# Altium PCB PCB_markw.pcbdoc
Units mm, origin at the board's own origin, x right, y up, seen from the top; angles counter-clockwise.
Board outline 132.6 x 130.99 mm, 2 copper layers (Top Layer, Bottom Layer); 60 components, 53 nets, 206 pads, 211 vias.
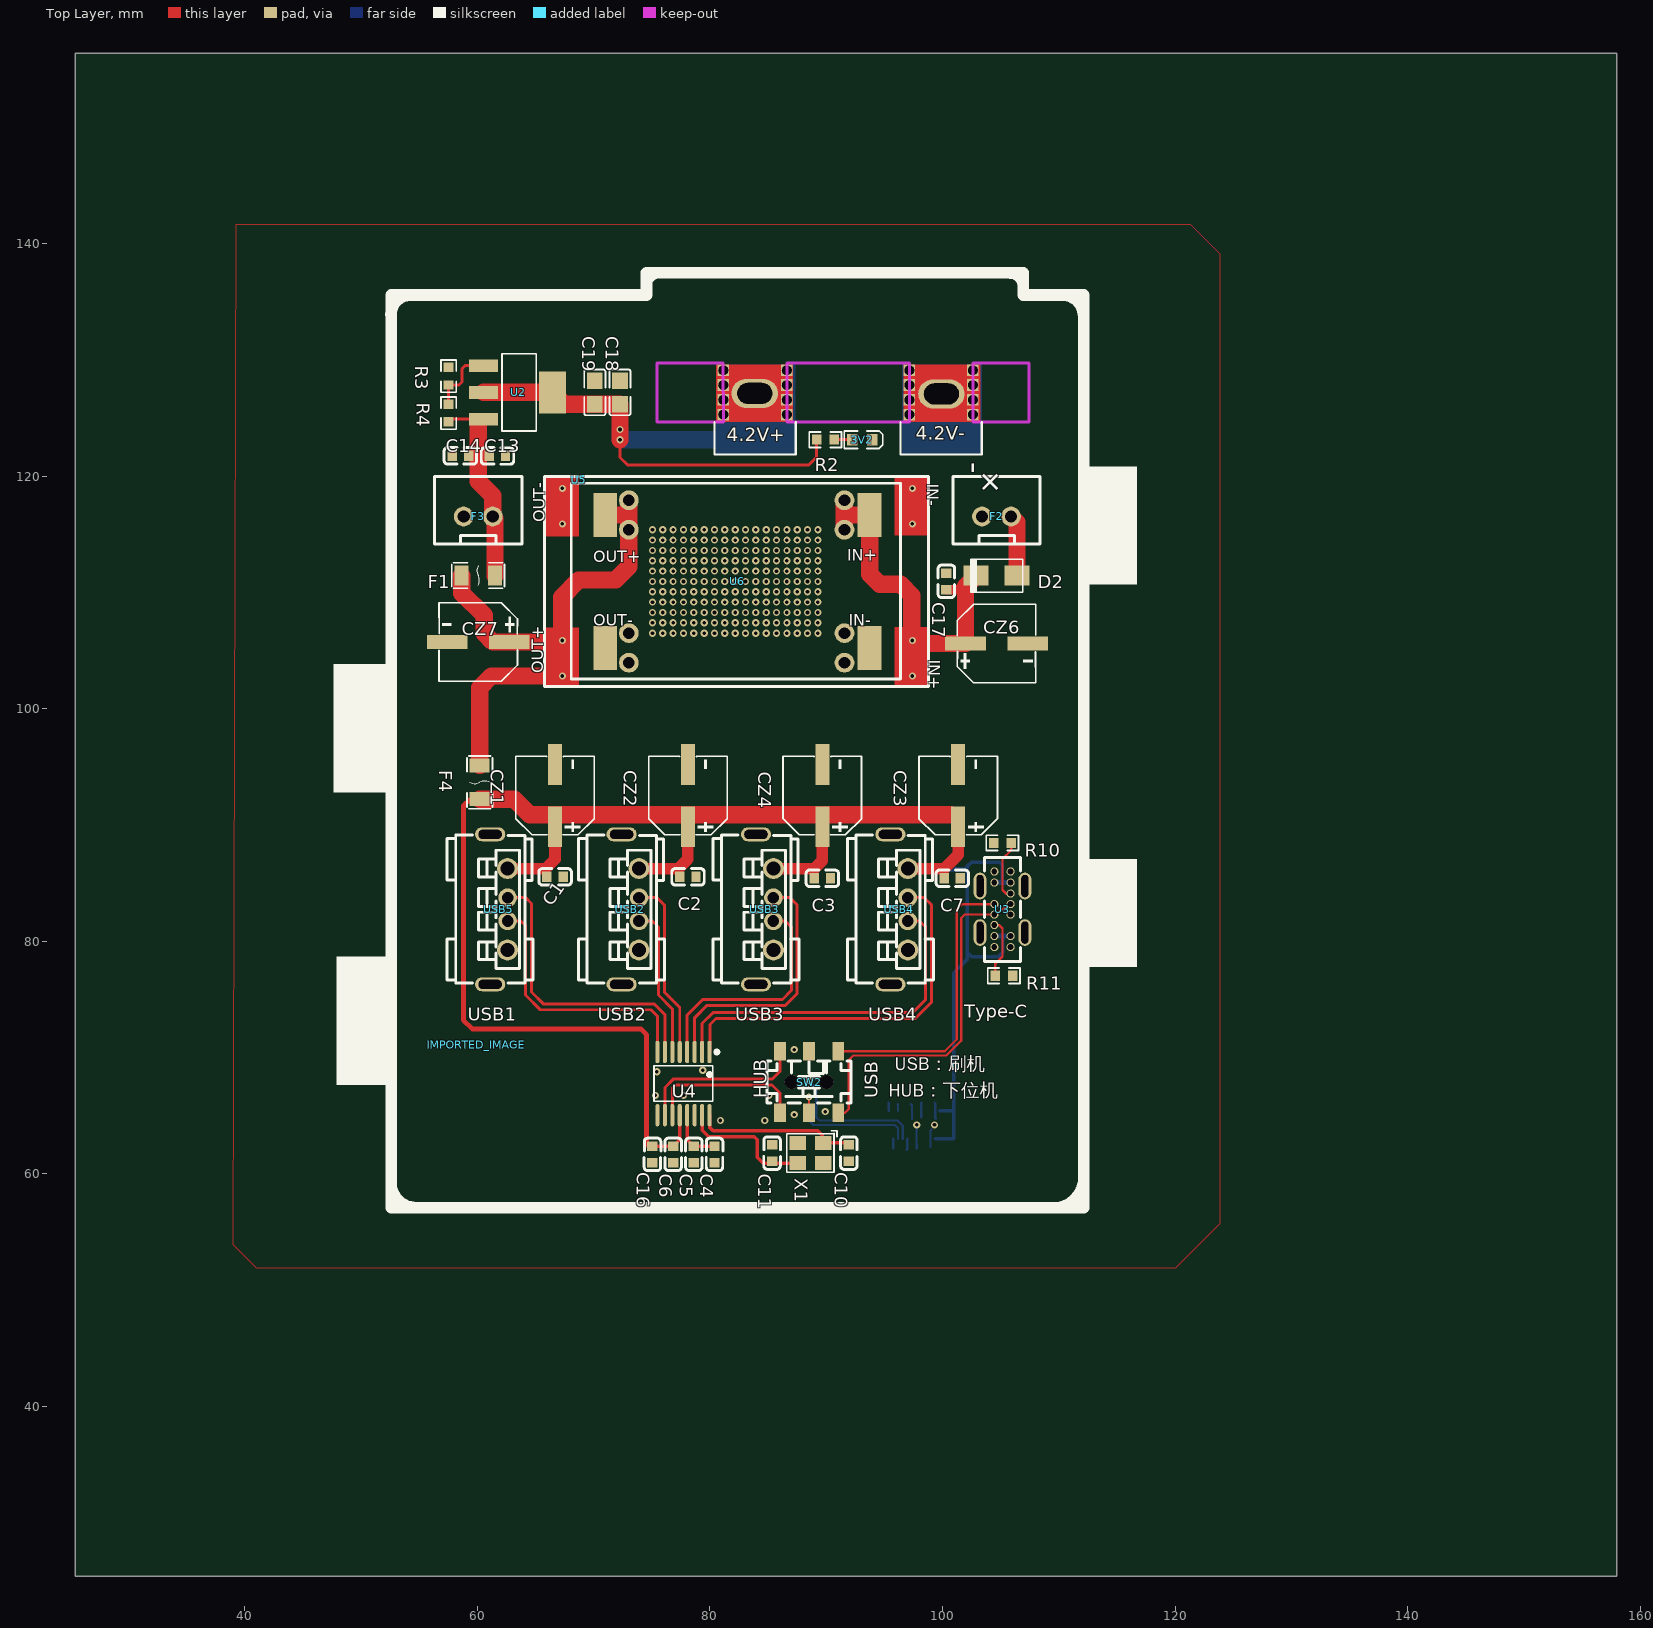
[diagram p0: Top Layer view]
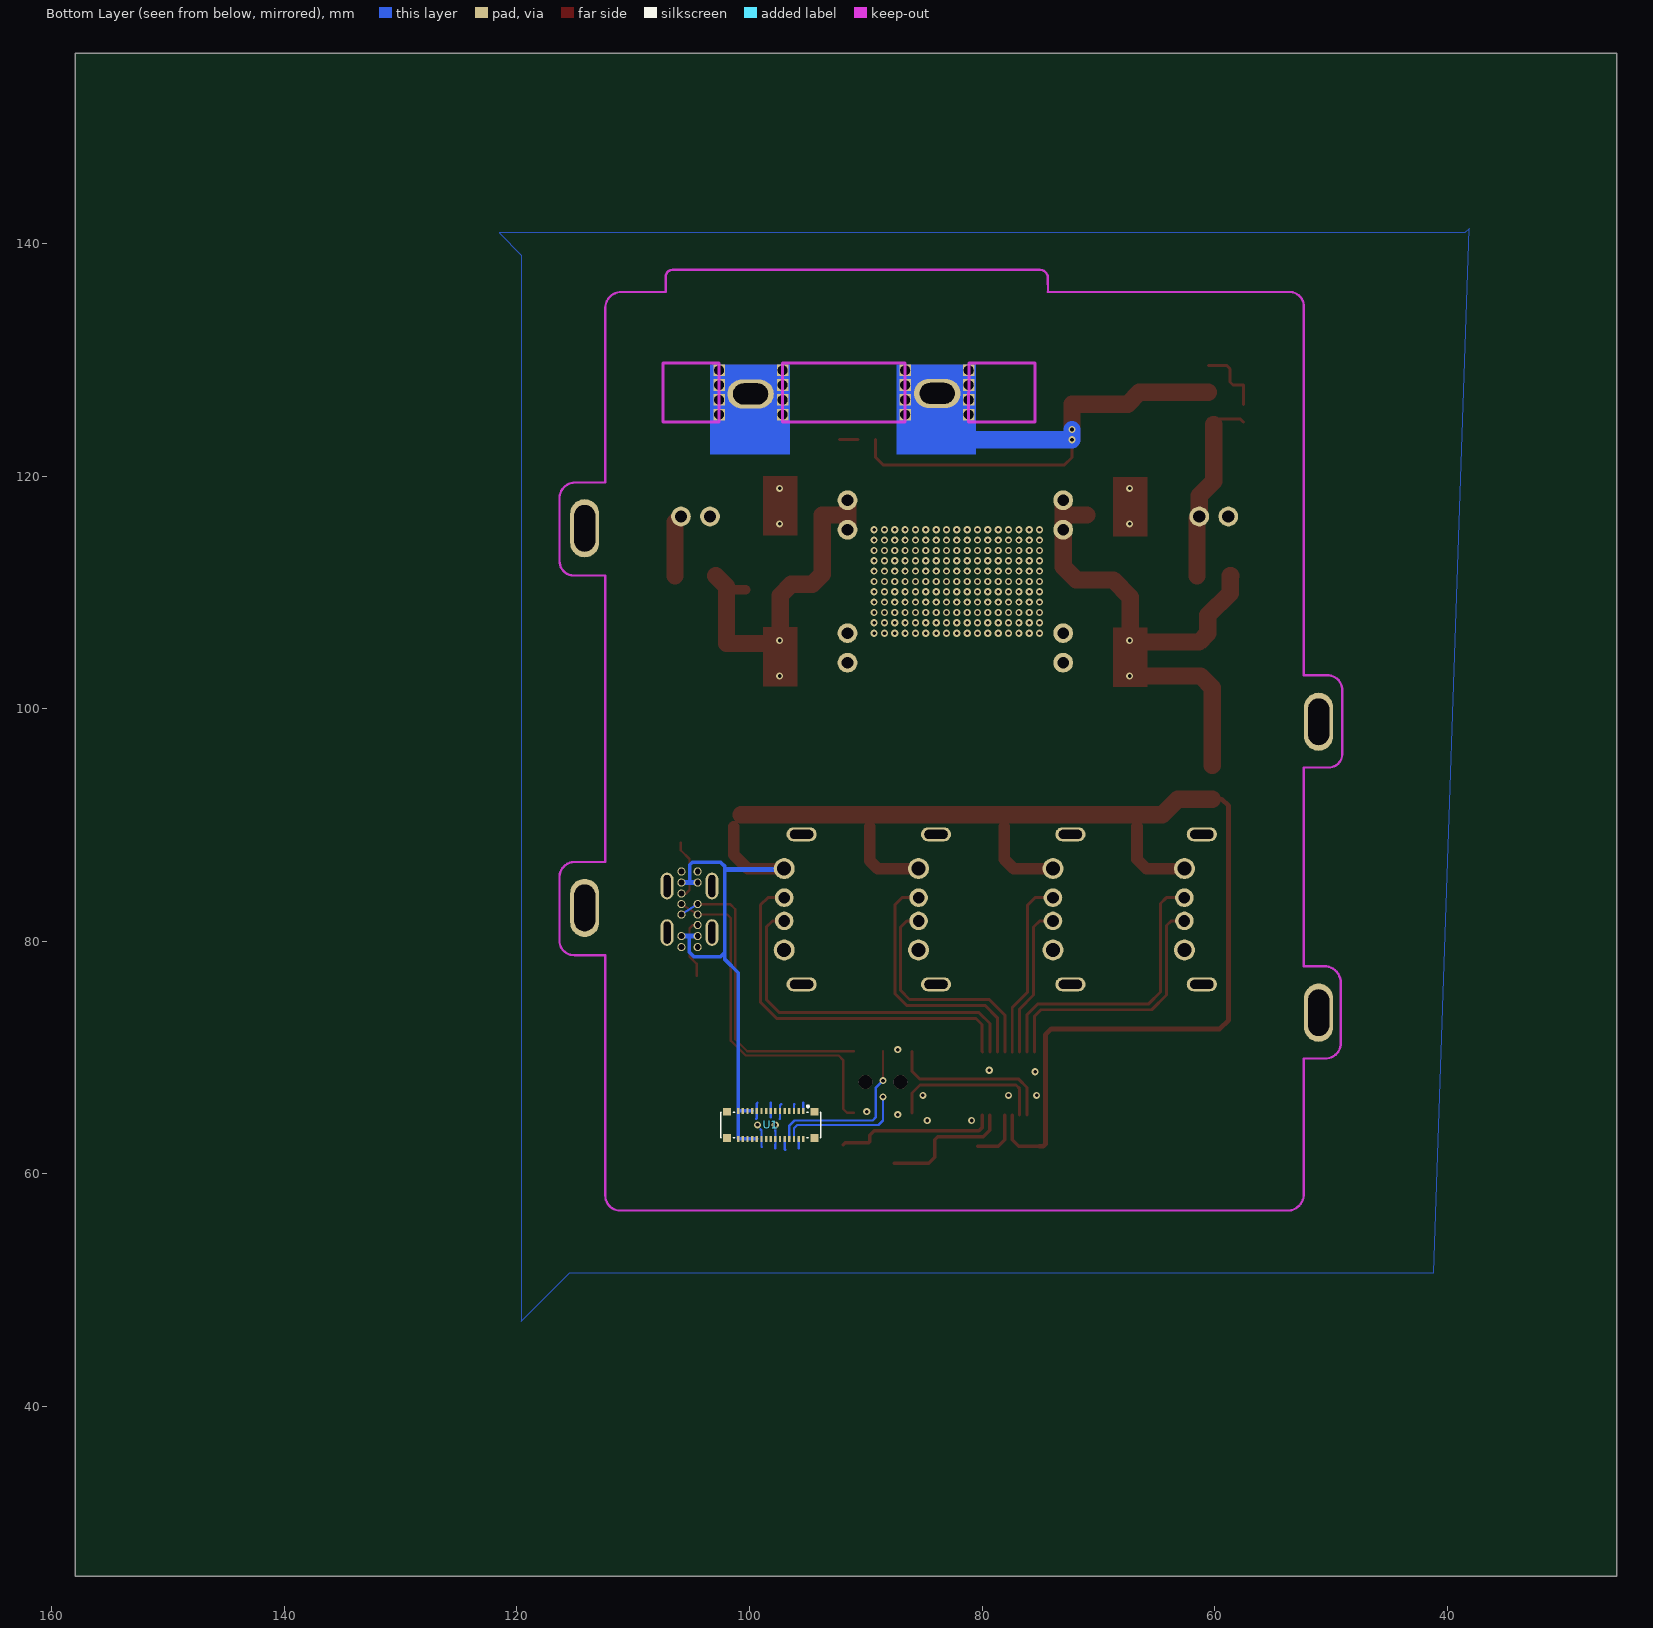
[diagram p1: Bottom Layer view, seen from below]

## Layer stack, top to bottom
Top Layer: signal copper (thickness not stored)
Dielectric: dielectric 0.32, FR-4, Dk 4.8
Bottom Layer: signal copper (thickness not stored)

## Board outline
158,25.4 25.4,25.4 25.4,156.388 158,156.388

## Components (designator, comment, footprint, x,y, rotation, side; value= is the part's Value field where it differs from the comment)
3V2 "LED" LED0603-R-BI 93.107,123.137 r180 top
C1 "10uf" C0603 66.675,85.545 r180 top
C2 "10uf" C0603 78.105,85.545 r180 top
C3 "10uf" C0603 89.662,85.418 r180 top
C4 "10uf" C0603 80.391,61.669 r270 top
C5 "10uf" C0603 78.613,61.669 r270 top
C6 "10uf" C0603 76.835,61.669 r270 top
C7 "100NF" C0603 100.838,85.418 r180 top
C10 "22PF" C0603 91.948,61.796 r90 top
C11 "22PF" C0603 85.344,61.796 r90 top
C13 "10UF" C0603 61.722,121.74 r180 top
C14 "100NF" C0603 58.547,121.74 r0 top
C16 "10uf" C0603 75.057,61.669 r270 top
C17 "0.1uF" C0603 100.33,110.945 r270 top
C18 "100NF" C0805 72.263,127.201 r270 top
C19 "10UF" C0805 70.104,127.201 r270 top
CZ1 "100uF" CAP-SMD_BD6.3-L6.6-W6.6-LS7.4-FD 66.676,92.531 r90 top
CZ2 "100uF" CAP-SMD_BD6.3-L6.6-W6.6-LS7.4-FD 78.106,92.531 r90 top
CZ3 "100uF" CAP-SMD_BD6.3-L6.6-W6.6-LS7.4-FD 101.347,92.531 r90 top
CZ4 "100uF" CAP-SMD_BD6.3-L6.6-W6.6-LS7.4-FD 89.663,92.531 r90 top
CZ6 "100uF" CAP-SMD_BD6.3-L6.6-W6.6-LS7.4-FD 104.649,105.612 r0 top
CZ7 "100uF" CAP-SMD_BD6.3-L6.6-W6.6-LS7.4-FD 60.072,105.739 r180 top
D2 "RS2MBG" DO214AC 104.648,111.453 r180 top
F1 "nSMD020" F1206 60.071,111.453 r0 top
F2 "2P" CONN-TH_2P-P2.50-XH2.54-2P 104.648,116.533 r180 top
F3 "2P" CONN-TH_2P-P2.50-XH2.54-2P 60.071,116.533 r180 top
F4 "nSMD020" F1206 60.198,93.673 r270 top
IMPORTED_IMAGE "IMPORTED_IMAGE" IMPORTED_IMAGE 59.914,71.1 r0 top
R2 "10K" R0603 89.932,123.137 r0 top
R3 "200" R0603 57.531,128.598 r90 top
R4 "100" R0603 57.531,125.423 r270 top
R10 "5.1K" R0603 105.156,88.466 r180 top
R11 "5.1K" R0603 105.283,77.036 r0 top
SW2 "K3-1390S-E1" SW-SMD_K3-1390S-E1 88.519,67.892 r270 top
U1 "OK-14F030-04" CONN-SMD_OK-14F030-04 98.171,64.209 r180 bottom
U2 "AMS1117-5.0RG" SOT-223-3_L6.4-W3.5-P2.30-LS7.0-BR 63.499,127.203 r180 top
U3 "TYPEC14PF立插式无弹片" USB-C-TH_918-418K2022Y40011 105.156,82.751 r90 top
U4 "CH334R" QSOP-16_L4.9-W3.9-P0.64-LS6.0-BL 77.724,67.765 r180 top
U5 "MINI5605V5A输出电源模块" MINI560PRO 68.707,119.708 r180 top
U6 "MP1584" MP1584DCDC 82.296,111.326 r180 top
USB2 "A/F180度插板10铜壳鱼叉脚无卷边_C109356" USB-A-TH_USB-A-F-1 73.152,82.751 r270 top
USB3 "A/F180度插板10铜壳鱼叉脚无卷边_C109356" USB-A-TH_USB-A-F-1 84.709,82.751 r270 top
USB4 "A/F180度插板10铜壳鱼叉脚无卷边_C109356" USB-A-TH_USB-A-F-1 96.266,82.751 r270 top
USB5 "A/F180度插板10铜壳鱼叉脚无卷边_C109356" USB-A-TH_USB-A-F-1 61.849,82.751 r270 top
X1 "12MHz" OSC-SMD_4P-L3.2-W2.5-BL 88.646,61.796 r180 top
? "" ? 83.502,65.505 r0 top
? "" ? 96.99,62.039 r0 top
? "" ? 66.515,80.327 r0 top
? "" ? 108.491,91.174 r0 top
? "" ? 93.511,117.337 r0 top
? "" ? 51.732,102.793 r0 top
? "" ? 53.868,86.38 r0 top
? "" ? 113.295,85.729 r0 top
? "" ? 121.003,69.843 r0 top
? "" ? 110.217,99.255 r0 top
? "" ? 118.51,113.453 r0 top
? "" ? 46.761,119.327 r0 top
? "" ? 119.352,127.645 r0 top
? "" ? 128.949,111.326 r0 top
? "" ? 63.309,137.705 r0 top

## Footprints (in the part's own frame and the unit in brackets; to place one, negate y for a bottom-side part, rotate by r counter-clockwise, add the part's x,y. Pads: shape width x height; smd on the part's side, far side on the other; paste and mask are expansions set on the pad)
C0603 [mm]
  rect 0.8x0.9 smd paste+0 mask+0.051: 1(-0.7,0) 2(0.7,0)
  silkscreen extent -1.41,-0.71 1.39,0.72
C0805 [mm]
  rect 1.41x1.35 smd paste-100 mask+0.051: 1(-1,0) 2(1,0)
  silkscreen extent -1.96,-0.9 1.96,0.9
CAP-SMD_BD6.3-L6.6-W6.6-LS7.4-FD [mm]
  rect 3.5x1.2 smd paste+0 mask+0.051: 1(-2.67,0) 2(2.67,0)
  silkscreen extent -3.38,-3.38 3.38,3.38
CONN-SMD_OK-14F030-04 [mm]
  rect 0.2x0.5 smd paste+0 mask+0.05: 1(2.8,1.2) 2(2.4,1.2) 3(2,1.2) 4(1.6,1.2) 5(1.2,1.2) 6(0.8,1.2) 7(0.4,1.2) 8(0,1.2) 9(-0.4,1.2) 10(-0.8,1.2) 11(-1.2,1.2) 12(-1.6,1.2) 13(-2,1.2) 14(-2.4,1.2) 15(-2.8,1.2) 16(-2.8,-1.2) 17(-2.4,-1.2) 18(-2,-1.2) 19(-1.6,-1.2) 20(-1.2,-1.2) 21(-0.8,-1.2) 22(-0.4,-1.2) 23(0,-1.2) 24(0.4,-1.2) 25(0.8,-1.2) 26(1.2,-1.2) 27(1.6,-1.2) 28(2,-1.2) 29(2.4,-1.2) 30(2.8,-1.2)
  rect 0.7x0.65 smd paste+0 mask+0.05: 31(3.75,-1.125) 32(3.75,1.125) 33(-3.75,1.125) 34(-3.75,-1.125)
  silkscreen extent -4.3,-1.1 4.3,1.7
CONN-TH_2P-P2.50-XH2.54-2P [mm]
  round 1.7 hole 1.05 paste+0 mask+0.05: 1(1.25,0) 2(-1.25,0)
  silkscreen extent -3.75,-3.42 3.75,2.37
DO214AC [mil]
  rect 84x68 smd paste+0 mask+2: 1(-69.2,0) 2(69.2,0)
  silkscreen extent -88,-56 88,56
F1206 [mm]
  rect 1.19x1.728 smd paste+0 mask+0.051: 1(-1.445,0) 2(1.445,0)
  silkscreen extent -2.27,-1.09 2.27,1.09
IMPORTED_IMAGE [mm]
LED0603-R-BI [mm]
  rect 0.9x1 smd paste+0 mask+0.051: 1(0.85,0) 2(-0.85,0)
  silkscreen extent -1.75,-0.75 1.55,0.75
MINI560PRO [mm]
  Top Layer region: -30.099,17.78 -27.178,17.78 -27.178,12.7 -30.099,12.7 -30.099,13.716 -30.099,13.843
  Top Layer region: -30.124,4.801 -27.203,4.801 -27.203,-0.279 -30.124,-0.279 -30.124,0.737 -30.124,0.864
  Top Layer region: 0.007,17.82 2.928,17.82 2.928,12.74 0.007,12.74 0.007,13.756 0.007,13.883
  Top Layer region: -0.025,4.866 2.896,4.866 2.896,-0.214 -0.025,-0.214 -0.025,0.802 -0.025,0.929
  silkscreen extent -30.1,-0.25 2.92,17.78
MP1584DCDC [mil]
  round 66.93 hole 39.37 paste+0 mask+2: 1(-365,290) 2(-365,190) 3(-365,-160) 4(-365,-260) 5(365,-260) 6(365,-160) 7(365,190) 8(365,290)
  rect 80x150 smd paste+0 mask+2: 9(-450,240) 10(-450,-210) 11(445,240) 12(445,-210)
  silkscreen extent -555,-318 560,345
OSC-SMD_4P-L3.2-W2.5-BL [mm]
  rect 1.4x1.2 smd paste+0 mask+0.051: 1(-1.1,-0.875) 2(1.1,-0.875) 3(1.1,0.875) 4(-1.1,0.875)
  silkscreen extent -2.29,-1.9 2.03,1.65
QSOP-16_L4.9-W3.9-P0.64-LS6.0-BL [mm]
  oval 0.35x1.922 smd paste+0 mask+0.051: 1(-2.24,-2.716) 2(-1.6,-2.716) 3(-0.96,-2.716) 4(-0.32,-2.716) 5(0.32,-2.716) 6(0.96,-2.716) 7(1.6,-2.716) 8(2.24,-2.716) 9(2.24,2.716) 10(1.6,2.716) 11(0.96,2.716) 12(0.32,2.716) 13(-0.32,2.716) 14(-0.96,2.716) 15(-1.6,2.716) 16(-2.24,2.716)
  silkscreen extent -3.02,-2.87 2.53,1.53
R0603 [mm]
  rect 0.806x0.864 smd paste-100 mask+0.051: 1(-0.753,0) 2(0.753,0)
  silkscreen extent -1.39,-0.66 1.39,0.66
SOT-223-3_L6.4-W3.5-P2.30-LS7.0-BR [mm]
  rect 2.5x1.1 smd paste+0 mask+0.051: 1(2.97,-2.3) 2(2.97,0) 3(2.97,2.3)
  rect 2.34x3.6 smd paste+0 mask+0.051: 4(-2.97,0)
  silkscreen extent -1.57,-3.33 1.37,3.33
SW-SMD_K3-1390S-E1 [mm]
  rect 1.6x1 smd paste+0 mask+0.051: 1(-2.65,2.5) 2(-2.65,0) 3(-2.65,-2.5) 4(2.65,-2.5) 5(2.65,0) 6(2.65,2.5)
  round 1.2 hole 1.2 unplated paste+0: ""(0,1.5) ""(0,-1.5)
  silkscreen extent -1.8,-3.6 1.8,3.6
USB-A-TH_USB-A-F-1 [mm]
  oval 1.2x2.6 hole 0.8 slot 2 at 90 deg paste+0 mask+0.051: 0(-6.45,-0.75) 0(6.45,-0.75)
  round 1.8 hole 1.21 paste+0 mask+0.051: 1(-3.5,0.75) 4(3.5,0.75)
  round 1.6 hole 1 paste+0 mask+0.051: 2(-1,0.75) 3(1,0.75)
  silkscreen extent -6.4,-4.45 6.35,2.95
USB-C-TH_918-418K2022Y40011 [mm]
  oval 2.3x1.1 hole 0.6 slot 1.9 at 0 deg paste+0 mask+0.051: 15(-2,-1.93) 16(2,-1.93) 17(2,1.93) 18(-2,1.93)
  round 0.7 hole 0.5 paste+0 mask+0.051: A1(-3.25,0.7) A4(-2.3,0.7) A5(-1.35,0.7) A6(-0.45,0.7) A7(0.45,0.7) A9(2.3,0.7) A12(3.25,0.7) B1(3.25,-0.7) B4(2.3,-0.7) B5(1.35,-0.7) B6(0.45,-0.7) B7(-0.45,-0.7) B9(-2.3,-0.7) B12(-3.25,-0.7)
  silkscreen extent -4.47,-1.55 4.47,1.55
? [mm]

## Free pads (board coordinates)
  rect 1x1 hole 0.8 slot 0.84 at 0 deg paste+0 mask+0.051: 1(81.153,125.296) 1(81.153,126.566) 1(81.153,127.836) 1(81.153,129.106) 1(86.614,125.296) 1(86.614,126.566) 1(86.614,127.836) 1(86.614,129.106) 1(97.155,125.296) 1(97.155,126.566) 1(97.155,127.836) 1(97.155,129.106) 1(102.616,125.296) 1(102.616,126.566) 1(102.616,127.836) 1(102.616,129.106)
  oval 2.5x5 hole 1.8 slot 4 at 90 deg paste+0 mask+0.051: 2(51.054,73.861) 2(51.054,98.88) 2(114.173,82.878) 2(114.173,115.517)
  oval 4x2.5 hole 1.8 slot 3 at 0 deg paste+0 mask+0.051: 2(83.857,127.119) 2(99.908,127.076)

## Via types
v1: diameter 0.62, hole 0.31, Top Layer to Bottom Layer, tented both sides, 211 vias

## Nets (pads, with @x,y where several pads share a name; then routed paths per layer and width w, separated by ;. In a path a pad name is that pad's centre, name@x,y a point inside that pad or via, vN(x,y) a via of type N, cw(c..) or ccw(c..) an arc to the next point about the centre after c; other vN are vias at no path point)
3V2_1: 3V2.1 R2.2 | length 1.6
  Top Layer w0.25: R2.2 3V2.1
4.2V: C18.2 C19.2 pad.1@81.153,125.296 pad.1@81.153,126.566 pad.1@81.153,127.836 pad.1@81.153,129.106 pad.1@86.614,125.296 pad.1@86.614,126.566 pad.1@86.614,127.836 pad.1@86.614,129.106 pad.2@83.857,127.119 R2.1 U2.2 U2.4 | length 46.6
  Top Layer w0.25: v1(72.263,123.137) 72.263,121.613 72.898,120.978 88.519,120.978 89.179,121.638 R2.1
  Top Layer w1.5: U2.2@60.53,127.201 66.47,127.201 67.47,126.201 C18.2 v1(72.263,124.012) v1(72.263,123.137)
  Bottom Layer w1.5: v1(72.263,124.012) v1(72.263,123.137) 82.169,123.137 82.296,123.264
5V: C13.2 C14.2 F1.2 F3.2 R4.2 U2.3 | length 16.7
  Top Layer w0.25: R4.2 57.762,124.901 U2.3@60.53,124.901
  Top Layer w1.5: U2.3@60.071,124.443 60.071,119.581 61.321,118.332 F3.2 61.516,116.339 F1.2
6V: C1.2 C2.2 C3.2 C6.1 C7.2 C16.1 CZ1.1 CZ2.1 CZ3.1 CZ4.1 F4.2 U1.12 U1.13 U1.14 U1.15 U1.16 U1.17 U1.18 U1.19 U1.20 U3.A4 U3.A9 U3.B4 U3.B9 U4.12 USB2.1 USB3.1 USB4.1 USB5.1 | length 165.7
  Top Layer w0.3: C16.1 C6.1 77.404,62.938 U4.12
  Top Layer w0.4: F4.2 59.388,92.228 58.801,91.641 58.801,73.226 59.563,72.464 74.041,72.464 74.549,71.956 74.549,62.558 74.737,62.37 C16.1
  Top Layer w1: USB5.1 65.857,86.251 66.675,87.069 CZ1.1 ; USB2.1 77.287,86.251 78.105,87.069 CZ2.1 ; USB3.1 88.971,86.251 89.662,86.942 CZ4.1 ; USB4.1 100.147,86.251 101.346,87.45 CZ3.1
  Top Layer w1.5: F4.2 63.167,92.228 64.516,90.879 100.711,90.879
  Bottom Layer w0.3: U1.20@99.376,63.009 U1.16 U1.15 U1.12@99.776,65.409 ; U1.15@100.97,65.408 100.97,77.295 102.108,78.433 102.108,79.424 ; 105.128,85.051 105.128,86.589 104.902,86.815 102.489,86.815 102.108,86.434 102.108,79.068 102.489,78.687 104.775,78.687 105.165,79.077 105.165,80.451
  Bottom Layer w0.4: USB4.1 97.086,86.173 101.981,86.18 ; U3.A4 U3.B9 ; U3.A9 U3.B4
+5V: CZ7.1 F1.1 F4.1 U6.5 U6.6 U6.12 | length 43.9
  Top Layer w1.5: F1.1 58.674,111.453 58.674,109.929 60.579,108.024 60.579,106.5 61.341,105.738 62.741,105.738 65.931,105.738 ; F4.1 60.198,101.801 61.214,102.817 65.786,102.817 ; 67.239,104.428 67.239,109.604 68.707,111.072 71.882,111.072 73.025,112.215 U6.5 ; U6.12 73.025,116.66
  other v1: 67.31,102.817 67.31,105.865
C5_1: C4.1 C5.1 U4.13 | length 4.7
  Top Layer w0.3: U4.13 78.044,62.938 C5.1 C4.1
CC1: R11.1 U3.A5 | length 5.2
  Top Layer w0.2: U3.A5 104.854,81.403 105.156,81.1 105.156,78.687 104.529,78.06 R11.1
CC2: R10.1 U3.B5 | length 5.2
  Top Layer w0.2: U3.B5@105.857,84.1 105.458,84.1 105.156,84.402 105.156,87.069 105.91,87.824 R10.1
D1+: U4.8 USB5.3 | length 22.9
  Top Layer w0.254: USB5.3@62.598,81.751 63.739,81.751 64.135,81.354 64.135,75.385 65.405,74.115 74.93,74.115 75.484,73.562 U4.8
D1-: U4.7 USB5.2 | length 25.4
  Top Layer w0.254: USB5.2 64.15,83.752 64.643,83.259 64.643,75.639 65.659,74.623 75.184,74.623 76.124,73.684 U4.7
D2+: U4.6 USB2.3 | length 13.1
  Top Layer w0.254: USB2.3@73.901,81.751 75.042,81.751 75.565,81.227 75.565,75.385 76.764,74.186 U4.6
D2-: U4.5 USB2.2 | length 15.6
  Top Layer w0.254: USB2.2 75.453,83.752 76.073,83.132 76.073,75.639 77.404,74.308 U4.5
D3+: U4.4 USB3.3 | length 20.2
  Top Layer w0.254: U4.4 78.044,73.673 79.375,75.004 86.233,75.004 86.995,75.766 86.995,81.227 86.472,81.751 USB3.3@85.458,81.751
D3-: U4.3 USB3.2 | length 22.5
  Top Layer w0.254: U4.3 78.684,73.424 79.756,74.496 86.487,74.496 87.503,75.512 87.503,83.132 86.883,83.752 USB3.2
D4+: U4.2 USB4.3 | length 30.5
  Top Layer w0.254: U4.2 79.324,72.922 80.264,73.861 97.409,73.861 98.552,75.004 98.552,81.227 98.029,81.751 USB4.3@97.015,81.751
D4-: U4.1 USB4.2 | length 32.9
  Top Layer w0.254: U4.1 80.01,70.526 80.01,72.845 80.518,73.353 97.663,73.353 99.06,74.75 99.06,83.132 98.41,83.752 USB4.2
D8+: SW2.6 U3.A6 U3.B6 | length 30.8
  Top Layer w0.2: SW2.6 91.585,65.243 91.948,65.606 91.948,69.797 92.329,70.178 100.33,70.178 101.6,71.448 101.6,81.989 101.912,82.302 U3.A6 ; U3.A6 U3.B6
D8-: SW2.1 U3.A7 U3.B7 | length 26.9
  Top Layer w0.2: SW2.1@91.018,70.542 100.185,70.542 101.219,71.575 101.219,82.751 101.669,83.201 U3.A7
  Bottom Layer w0.2: U3.A7 U3.B7
D9+: SW2.4 U4.11 | length 13.7
  Top Layer w0.254: U4.11 76.764,67.313 77.089,67.638 85.344,67.638 86.02,66.963 SW2.4
D9-: SW2.3 U4.10 | length 14.6
  Top Layer w0.254: U4.10 76.124,67.435 76.835,68.146 85.344,68.146 86.02,68.822 SW2.3@86.02,70.542
D+: SW2.5 U1.28 | length 12.3
  Top Layer w0.2: SW2.5 v1(88.519,66.622)
  Bottom Layer w0.2: v1(88.519,66.622) 88.519,64.59 88.9,64.209 95.885,64.209 96.172,63.922 U1.28
D-: SW2.2 U1.27 | length 14.8
  Top Layer w0.2: v1(88.519,68.019) SW2.2
  Bottom Layer w0.2: v1(88.519,68.019) 89.154,67.384 89.154,64.844 89.408,64.59 96.139,64.59 96.484,64.245 96.571,64.159 U1.27
F2_2: D2.1 F2.2 | length 5.3
  Top Layer w1.5: F2.2 106.406,116.026 D2.1
GND: 3V2.2 C1.1 C2.1 C3.1 C4.2 C5.2 C6.2 C7.1 C10.1 C11.2 C13.1 C14.1 C16.2 C17.1 C18.1 C19.1 CZ1.2 CZ2.2 CZ3.2 CZ4.2 CZ6.2 CZ7.2 F2.1 F3.1 pad.1@97.155,125.296 pad.1@97.155,126.566 pad.1@97.155,127.836 pad.1@97.155,129.106 pad.1@102.616,125.296 pad.1@102.616,126.566 pad.1@102.616,127.836 pad.1@102.616,129.106 pad.2@51.054,73.861 pad.2@51.054,98.88 pad.2@99.908,127.076 pad.2@114.173,82.878 pad.2@114.173,115.517 R3.2 R10.2 R11.2 U1.1 U1.3 U1.6 U1.8 U1.11 U1.21 U1.24 U1.25 U1.26 U1.29 U1.31 U1.32 U1.33 U1.34 U3.15 U3.16 U3.17 U3.18 U3.A1 U3.A12 U3.B1 U3.B12 U4.14 U6.1 U6.2 U6.7 U6.8 U6.9 U6.11 USB2.0 USB2.4 USB3.0 USB3.4 USB4.0 USB4.4 USB5.0 USB5.4 X1.2 X1.4 | length 10.8
  Bottom Layer w0.2: U1.1@95.372,65.408 95.377,66.114 ; 95.758,62.177 U1.29 ; 96.139,65.987 96.172,65.987 U1.3@96.172,65.408 ; 96.901,62.05 96.971,62.12 U1.26 ; 97.282,65.987 97.371,65.898 U1.6 97.371,64.717 97.409,64.717 ; 97.79,62.177 U1.24 v1(97.79,64.209) ; 98.171,64.844 U1.8 98.171,66.114 ; 98.933,62.304 98.971,62.304 U1.21 ; U1.21 98.971,63.739 99.06,63.828 ; 99.314,66.114 99.371,66.057 U1.11 99.371,64.787 99.441,64.717
  other v1: 99.314,64.209 80.899,64.59 84.709,64.59 87.249,65.098 89.916,65.352 75.311,66.749 77.724,66.749 85.09,66.749 75.438,68.781 79.375,68.908 87.249,70.686 75.057,106.5 75.946,106.5 76.835,106.5 77.724,106.5 78.613,106.5 79.502,106.5 80.391,106.5 81.28,106.5 82.169,106.5 83.058,106.5 83.947,106.5 84.836,106.5 85.725,106.5 86.614,106.5 87.503,106.5 88.392,106.5 89.281,106.5 75.057,107.389 75.946,107.389 76.835,107.389 77.724,107.389 78.613,107.389 79.502,107.389 80.391,107.389 81.28,107.389 82.169,107.389 83.058,107.389 83.947,107.389 84.836,107.389 85.725,107.389 86.614,107.389 87.503,107.389 88.392,107.389 89.281,107.389 75.057,108.278 75.946,108.278 76.835,108.278 77.724,108.278 78.613,108.278 79.502,108.278 80.391,108.278 81.28,108.278 82.169,108.278 83.058,108.278 83.947,108.278 84.836,108.278 85.725,108.278 86.614,108.278 87.503,108.278 88.392,108.278 89.281,108.278 75.057,109.167 75.946,109.167 76.835,109.167 77.724,109.167 78.613,109.167 79.502,109.167 80.391,109.167 81.28,109.167 82.169,109.167 83.058,109.167 83.947,109.167 84.836,109.167 85.725,109.167 86.614,109.167 87.503,109.167 88.392,109.167 89.281,109.167 75.057,110.056 75.946,110.056 76.835,110.056 77.724,110.056 78.613,110.056 79.502,110.056 80.391,110.056 81.28,110.056 82.169,110.056 83.058,110.056 83.947,110.056 84.836,110.056 85.725,110.056 86.614,110.056 87.503,110.056 88.392,110.056 89.281,110.056 75.057,110.945 75.946,110.945 76.835,110.945 77.724,110.945 78.613,110.945 79.502,110.945 80.391,110.945 81.28,110.945 82.169,110.945 83.058,110.945 83.947,110.945 84.836,110.945 85.725,110.945 86.614,110.945 87.503,110.945 88.392,110.945 89.281,110.945 75.057,111.834 75.946,111.834 76.835,111.834 77.724,111.834 78.613,111.834 79.502,111.834 80.391,111.834 81.28,111.834 82.169,111.834 83.058,111.834 83.947,111.834 84.836,111.834 85.725,111.834 86.614,111.834 87.503,111.834 88.392,111.834 89.281,111.834 75.057,112.723 75.946,112.723 76.835,112.723 77.724,112.723 78.613,112.723 79.502,112.723 80.391,112.723 81.28,112.723 82.169,112.723 83.058,112.723 83.947,112.723 84.836,112.723 85.725,112.723 86.614,112.723 87.503,112.723 88.392,112.723 89.281,112.723 75.057,113.612 75.946,113.612 76.835,113.612 77.724,113.612 78.613,113.612 79.502,113.612 80.391,113.612 81.28,113.612 82.169,113.612 83.058,113.612 83.947,113.612 84.836,113.612 85.725,113.612 86.614,113.612 87.503,113.612 88.392,113.612 89.281,113.612 75.057,114.501 75.946,114.501 76.835,114.501 77.724,114.501 78.613,114.501 79.502,114.501 80.391,114.501 81.28,114.501 82.169,114.501 83.058,114.501 83.947,114.501 84.836,114.501 85.725,114.501 86.614,114.501 87.503,114.501 88.392,114.501 89.281,114.501 75.057,115.39 75.946,115.39 76.835,115.39 77.724,115.39 78.613,115.39 79.502,115.39 80.391,115.39 81.28,115.39 82.169,115.39 83.058,115.39 83.947,115.39 84.836,115.39 85.725,115.39 86.614,115.39 87.503,115.39 88.392,115.39 89.281,115.39
R4_1: R3.1 R4.1 U2.1 | length 6
  Top Layer w0.25: R4.1 R3.1 58.429,127.845 58.674,128.09 58.674,129.233 58.942,129.501 U2.1@60.53,129.501
S$9185: 
S$9213: 
S$14370: 
S$28708: 
S$28823: 
S$28845: 
S$33329: 
S$33333: 
S$33353: 
S$33399: 
S$33403: 
S$35950: 
S$35954: 
S$35958: 
S$35962: 
U1_2: U1.2
U1_4: U1.4
U1_5: U1.5
U1_7: U1.7
U1_9: U1.9
U1_10: U1.10
U1_22: U1.22
U1_23: U1.23
U1_30: U1.30
U4_9: U4.9
VCC: C17.2 CZ6.1 D2.2 U6.3 U6.4 U6.10 | length 32.4
  Top Layer w0.8: C17.2 101.978,110.245
  Top Layer w1.5: U6.3 U6.4 ; 91.567,116.673 U6.10 93.726,111.58 94.615,110.691 96.393,110.691 97.346,109.739 97.346,104.468 98.489,105.611 101.978,105.611 101.978,110.541 D2.2
  other v1: 97.409,102.817 97.409,105.865
XIN: C10.2 U4.16 X1.1 | length 14
  Top Layer w0.3: U4.16 79.964,64.001 80.264,63.701 89.281,63.701 89.662,63.32 89.662,62.754 89.746,62.67 91.773,62.671 C10.2
XOUT: C11.1 U4.15 X1.3 | length 11.6
  Top Layer w0.3: U4.15 79.324,63.752 79.883,63.193 83.82,63.193 84.074,62.939 84.074,61.415 84.569,60.92 X1.3@87.546,60.92
pads on no net: SW2.
copper on no net:
  other v1: 67.31,115.898 97.409,115.898 67.31,118.946 97.409,118.946

## Polygon pours and split planes (outlines as drawn)
GND on Top Layer (solid): 39.243,141.679 121.285,141.679 123.825,139.139 123.825,55.7 120.015,51.89 41.021,51.89 38.989,53.922
GND on Bottom Layer (solid): 38.1,141.298 38.481,140.917 121.539,140.917 119.634,139.012 119.634,47.318 115.443,51.509 41.148,51.509

## Keep-outs
Keep-Out Layer:
  lines w0.2 net S$28708: 52.324,58.352 ccw(c53.737,58.258) 53.8,56.843 ; 52.324,134.539 cw(c53.562,134.6) 53.647,135.837 ; 110.962,135.837 cw(c111.031,134.475) 112.395,134.478 ; 111.11,56.843 ccw(c111.141,58.097) 112.395,58.131
  lines w0.2 net S$28823: 114.992,119.454 cw(c115.002,118.121) 116.332,118.205 ; 115.043,78.814 ccw(c115.103,80.051) 116.332,79.901 ; 115.106,86.815 cw(c115.062,85.545) 116.332,85.573 ; 115.146,111.453 ccw(c115.107,112.679) 116.332,112.723
  lines w0.2 net S$28845: 49.022,96.069 ccw(c50.196,96.117) 50.252,94.943 ; 49.022,101.545 cw(c50.29,101.607) 50.362,102.874 ; 49.149,71.275 ccw(c50.462,71.236) 50.528,69.924 ; 49.149,76.417 cw(c50.577,76.432) 50.602,77.859
  lines w0.2 net S$33353: 74.337,137.004 cw(c75.029,137.049) 75.027,137.742 ; 106.621,137.742 cw(c106.619,137.162) 107.188,137.278

## Other copper
Top Layer:
  rectangle: 80.518,124.661 87.122,129.614
  rectangle net GND: 96.647,124.661 103.251,129.614
Bottom Layer:
  rectangle net GND: 96.52,121.867 103.378,129.614
  rectangle net 4.2V: 80.518,121.867 87.376,129.614

## Silkscreen, mask and mechanical layers (free items; w line width, h text height)
Top Overlay:
  rectangle: 47.625,92.784 52.324,103.833
  rectangle: 47.879,67.638 52.578,78.687
  rectangle: 112.268,110.691 116.713,120.851
  rectangle: 112.268,77.798 116.713,87.069
  lines w0.2 net S$33329: 80.391,124.661 80.391,121.867 87.376,121.867 87.376,124.661
  lines w0.2 net S$33333: 96.393,124.661 96.393,121.867 103.378,121.867 103.378,124.661
  lines w0.5 net S$33403: 52.578,58.122 ccw(c53.593,58.113) 53.591,57.097 ; 111.12,57.097 ccw(c111.106,58.137) 112.141,58.037
  lines w1 net S$33399: 52.578,133.704 cw(c54.272,133.881) 54.317,135.583 ; 53.467,135.583 74.549,135.583 74.549,137.488 106.934,137.488 106.934,135.583 112.141,135.583 112.141,57.097 ; 74.549,136.742 cw(c75.648,136.328) 75.464,137.488 ; 105.878,137.471 cw(c105.787,136.306) 106.937,136.514 ; 110.043,57.097 ccw(c109.472,59.731) 112.141,59.357 ; 110.326,135.583 cw(c110.3,133.743) 112.141,133.752
  lines w1 net S$33403: 52.578,59.09 ccw(c54.694,59.217) 54.707,57.097 ; 53.467,135.583 52.578,135.583 52.578,57.097 112.141,57.097
  text "4.2V-" at 97.686,122.756 h2
  text "4.2V+" at 81.453,122.629 h2
  text "+" at 104.311,120.935 h2.03 r225
  text "-" at 103.378,120.216 h2.03 r90
  text "IN+" at 91.821,112.731 h1
  text "OUT+" at 69.977,112.604 h1
  text "OUT-" at 69.977,107.143 h1
  text "IN-" at 91.948,107.143 h1
  text "Type-C" at 101.854,73.417 h1.14
  text "USB1" at 59.182,73.163 h1.14
  text "USB2" at 70.358,73.163 h1.14
  text "USB3" at 82.169,73.163 h1.14
  text "USB4" at 93.599,73.163 h1.14
  text "USB：刷机" at 95.885,68.527 h2
  text "HUB" at 84.9,66.495 h1.14 r90
  text "USB" at 94.424,66.495 h1.14 r90
  text "HUB：下位机" at 95.377,66.241 h2
Top Solder:
  rectangle: 80.518,124.661 87.249,129.614
  rectangle: 96.52,124.661 103.251,129.614
  lines w0.2 net S$9185: 56.007,131.519 63.373,131.519 63.373,133.551 56.007,133.551 56.007,131.519
  lines w0.2 net S$9213: 97.536,60.382 106.934,60.382 106.934,62.414 97.536,62.414 97.536,60.382
  lines w0.254 net S$14370: 72.009,98.626 88.519,98.626 88.519,100.785 72.009,100.785 72.009,98.626
  text "SHIQI Technology" at 76.2,132.154 h3.8 r359
  text "Hub 3.0" at 56.261,131.9 h2
  text "HM4 Hub For UFI" at 72.136,98.753 h2
  text "2023.12.12" at 97.79,60.78 h2
Bottom Solder:
  rectangle: 80.391,124.661 87.249,129.614
  rectangle net GND: 96.52,124.661 103.251,129.614

## Text inside footprints (layer, text, board x,y; h text height)
U5: Top Overlay "IN+" at 98.814,104.214 h1 r270; Top Overlay "IN-" at 98.687,119.327 h1 r270; Top Overlay "OUT+" at 65.651,103.071 h1 r90; Top Overlay "OUT-" at 65.778,116.025 h1 r90